# Altium PCB PCB2.PcbDoc
Units mm, origin at the board's own origin, x right, y up, seen from the top; angles counter-clockwise.
Board outline 22.25 x 40.25 mm, 2 copper layers (Top Layer, Bottom Layer); 2 components, 30 nets, 60 pads, 45 vias.
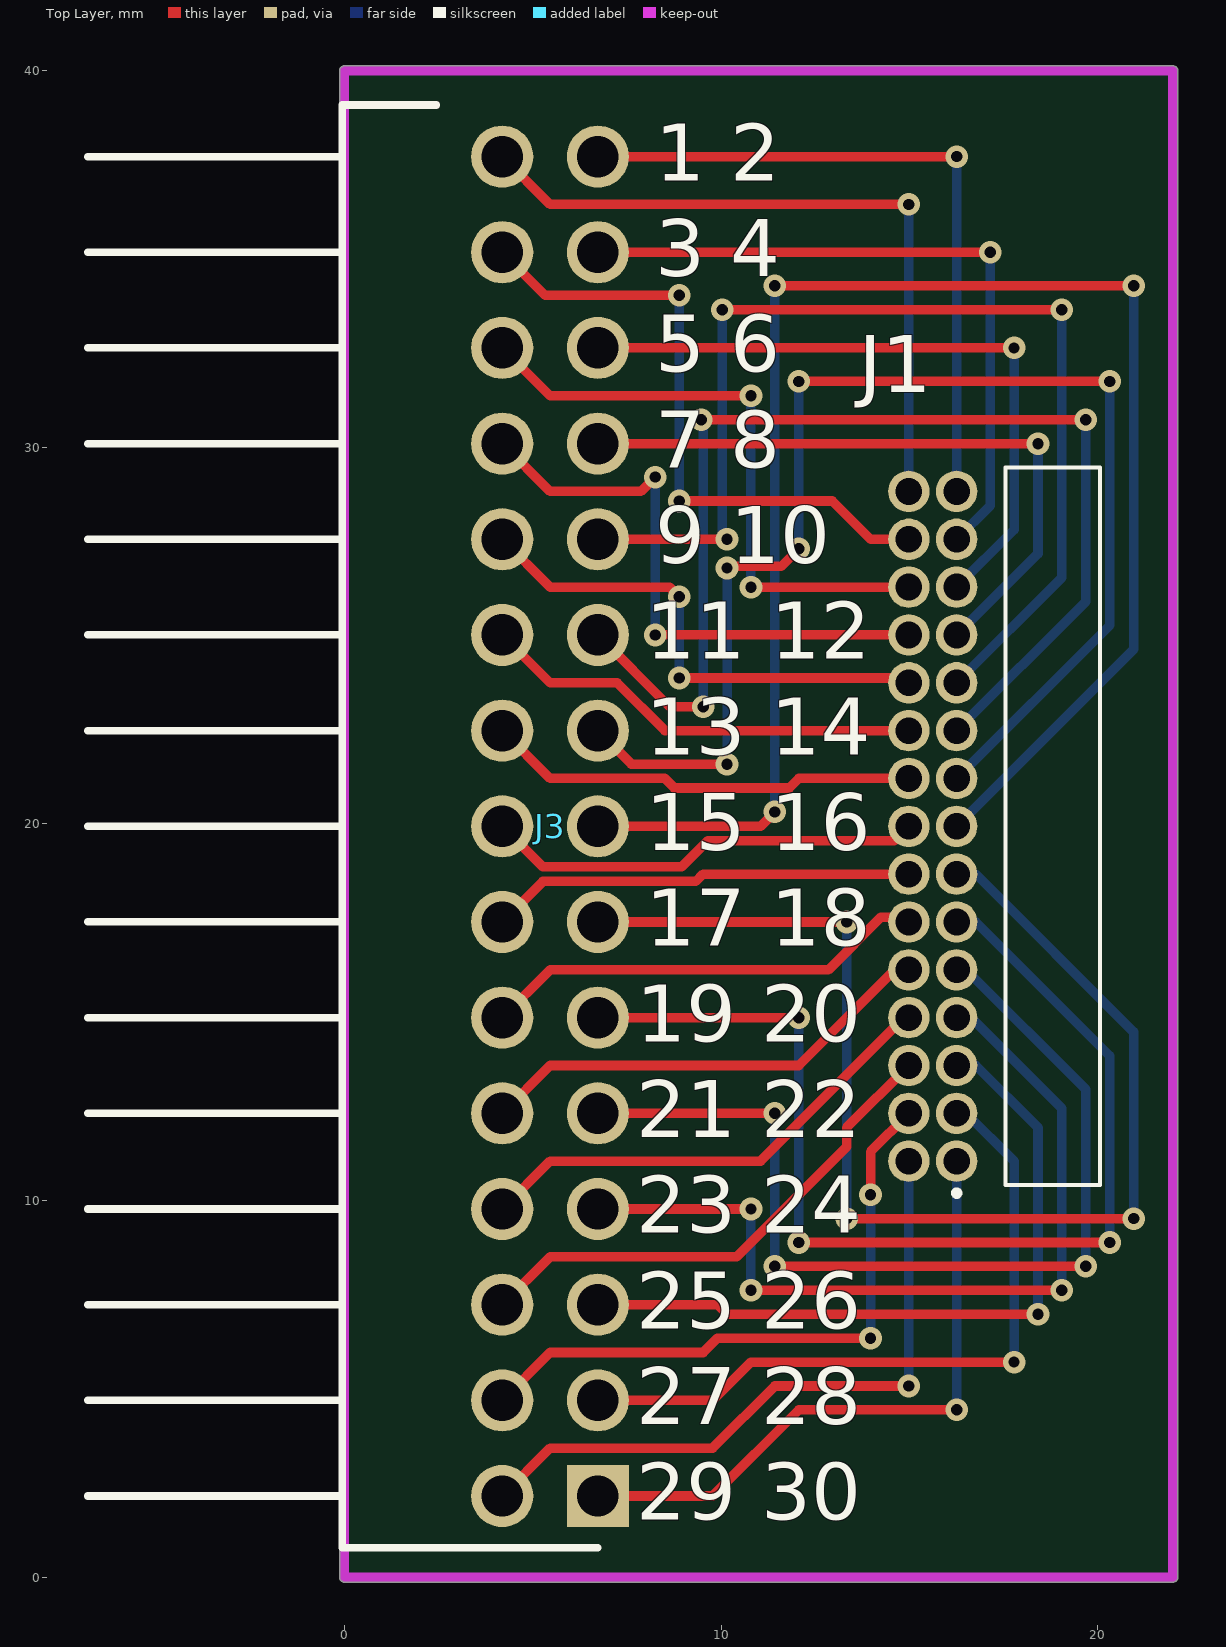
[diagram p0: Top Layer view]
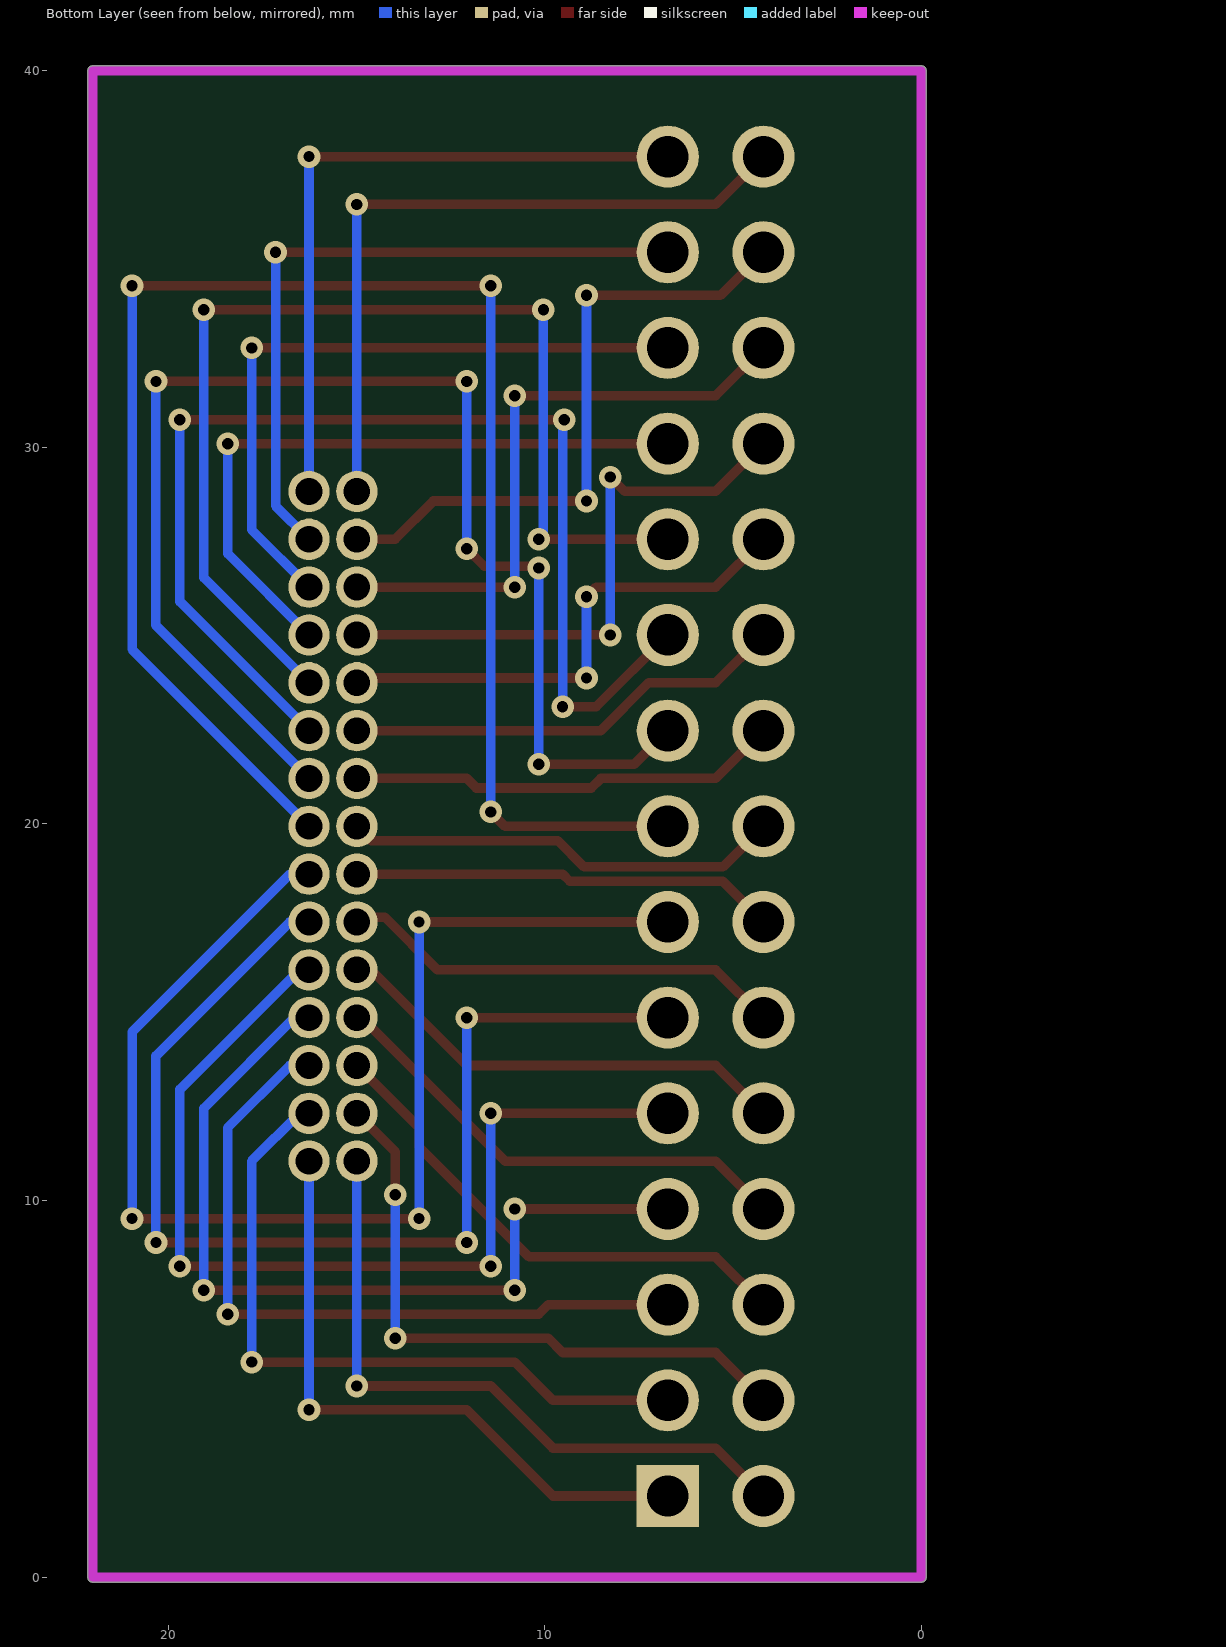
[diagram p1: Bottom Layer view, seen from below]

## Layer stack, top to bottom
Top Solder: solder mask 0.0102, Solder Resist, Dk 3.5
Top Layer: signal copper 0.0356
Dielectric 1: dielectric 0.32, FR-4, Dk 4.8
Bottom Layer: signal copper 0.0356
Bottom Solder: solder mask 0.0102, Solder Resist, Dk 3.5

## Board outline
0,-0.127 cw(c0,0) -0.127,0 -0.127,40 cw(c0,40) 0,40.127 22,40.127 cw(c22,40) 22.127,40 22.127,0 cw(c22,0) 22,-0.127

## Design rules (kind name [scope] priority, off if disabled: settings)
BoardOutlineClearance [All] p1: gap=0.2
Clearance [All] p1: gap=0.127 except(0.114: THPad-THPad)
ComponentClearance [All] p1: gap=0.127 collisioncheckmode=3 verticalgap=0.127 showdistances=TRUE
DiffPairsRouting [All] p1: maxlimit=0.254 minlimit=0.127 mostfreqgap=0.127 toplayer_minwidth=0.127 toplayer_maxwidth=25.4 toplayer_prefwidth=0.127 bottomlayer_minwidth=0.127 bottomlayer_maxwidth=25.4 bottomlayer_prefwidth=0.127 maxuncoupledlength=12.7
Height [All] p1: minheight=0 maxheight=1816.048 prefheight=12.7
HoleSize [All] p1: absolutevalues=TRUE maxlimit=6.3 minlimit=0.3 maxpercent=80.000 minpercent=20.000
HoleToHoleClearance [All] p1: gap=0.25 allowstackedmicrovias=FALSE
MinimumAnnularRing [All] p1: minimumring=0.076
MinimumSolderMaskSliver [All] p1: minsoldermaskwidth=0
PlaneClearance [All] p1: clearance=0.127
PlaneConnect PlaneConnectPowerPads [InPadClass('PowerPads')] p1: planeconnectstyle=Direct reliefexpansion=0.508 reliefentries=4 reliefconductorwidth=0.254 reliefairgap=0.254
PlaneConnect [All] p2: planeconnectstyle=Relief reliefexpansion=0.508 reliefentries=4 reliefconductorwidth=0.254 reliefairgap=0.254
PolygonConnect PolygonConnectPowerPads [All vs (InPadClass('PowerPads'))] p1: connectstyle=Direct reliefconductorwidth=0.254 reliefentries=4 polygonreliefangle="90 Angle" airgapwidth=0.254
PolygonConnect [All] p2: connectstyle=Relief reliefconductorwidth=0.254 reliefentries=4 polygonreliefangle="45 Angle" airgapwidth=0.254
RoutingVias [All] p1: holewidth=0.3 width=0.6 viastyle="Through Hole" minholewidth=0.3 minwidth=0.6 maxholewidth=0.6 maxwidth=6.6
SilkToSilkClearance [All] p1: silktosilkclearance=0
SilkToSolderMaskClearance [IsPad] p1: minsilkscreentomaskgap=0.127 clearancetoexposedcopper=TRUE
SolderMaskExpansion [All] p1: expansion=0.075
Width [All] p1: maxlimit=25.4 minlimit=0.127 preferedwidth=0.254 minimp=50.000000 maximp=50.000000 favimp=50.000000
20 further rules are at their usual default settings.

## Components (designator, comment, footprint, x,y, rotation, side; value= is the part's Value field where it differs from the comment)
J1 "FTSH-115-01-F-D-RA-K" FTSH-115-XX-YYY-D-RA-K 16.256,11.049 r90 top
J3 "90122-0775" HDRRA30W65P254_2X15_3802X250X635P 6.731,2.159 r90 top locked

## Footprints (in the part's own frame and the unit in brackets; to place one, negate y for a bottom-side part, rotate by r counter-clockwise, add the part's x,y. Pads: shape width x height; smd on the part's side, far side on the other; paste and mask are expansions set on the pad)
FTSH-115-XX-YYY-D-RA-K [mm]
  round 1.1 hole 0.71: 1(0,0) 2(0,1.27) 3(1.27,0) 4(1.27,1.27) 5(2.54,0) 6(2.54,1.27) 7(3.81,0) 8(3.81,1.27) 9(5.08,0) 10(5.08,1.27) 11(6.35,0) 12(6.35,1.27) 13(7.62,0) 14(7.62,1.27) 15(8.89,0) 16(8.89,1.27) 17(10.16,0) 18(10.16,1.27) 19(11.43,0) 20(11.43,1.27) 21(12.7,0) 22(12.7,1.27) 23(13.97,0) 24(13.97,1.27) 25(15.24,0) 26(15.24,1.27) 27(16.51,0) 28(16.51,1.27) 29(17.78,0) 30(17.78,1.27)
  silkscreen extent -0.9,-3.8 18.41,0.05
HDRRA30W65P254_2X15_3802X250X635P [mm]
  rect 1.65x1.65 hole 1.1: 1(0,0)
  round 1.65 hole 1.1: 2(0,2.54) 3(2.54,0) 4(2.54,2.54) 5(5.08,0) 6(5.08,2.54) 7(7.62,0) 8(7.62,2.54) 9(10.16,0) 10(10.16,2.54) 11(12.7,0) 12(12.7,2.54) 13(15.24,0) 14(15.24,2.54) 15(17.78,0) 16(17.78,2.54) 17(20.32,0) 18(20.32,2.54) 19(22.86,0) 20(22.86,2.54) 21(25.4,0) 22(25.4,2.54) 23(27.94,0) 24(27.94,2.54) 25(30.48,0) 26(30.48,2.54) 27(33.02,0) 28(33.02,2.54) 29(35.56,0) 30(35.56,2.54)
  silkscreen extent -1.37,0 36.93,13.54, body extent -1.27,-0.35 36.83,13.51, height 6.07

## Part data
J1 J3: "Connector"

## Via types
v1: diameter 0.6, hole 0.3, Top Layer to Bottom Layer, tented both sides, 45 vias

## Nets (pads, with @x,y where several pads share a name; then routed paths per layer and width w, separated by ;. In a path a pad name is that pad's centre, name@x,y a point inside that pad or via, vN(x,y) a via of type N, cw(c..) or ccw(c..) an arc to the next point about the centre after c; other vN are vias at no path point)
1: J1.30 J3.30 | length 18.9
  Top Layer w0.254: J3.30 5.461,36.449 v1(14.986,36.449)
  Bottom Layer w0.254: J1.30 v1(14.986,36.449)
2: J1.29 J3.29 | length 18.4
  Top Layer w0.254: J3.29 v1(16.256,37.719)
  Bottom Layer w0.254: J1.29 v1(16.256,37.719)
3: J1.28 J3.28 | length 17.2
  Top Layer w0.254: J3.28 5.334,34.036 v1(8.89,34.036) ; v1(8.89,28.575) 12.954,28.575 13.97,27.559 J1.28
  Bottom Layer w0.254: v1(8.89,28.575) v1(8.89,34.036)
4: J1.27 J3.27 | length 18.4
  Top Layer w0.254: J3.27 v1(17.145,35.179)
  Bottom Layer w0.254: J1.27 17.145,28.448 v1(17.145,35.179)
5: J1.26 J3.26 | length 16.4
  Top Layer w0.254: J3.26 5.461,31.369 v1(10.795,31.369) ; v1(10.795,26.289) J1.26
  Bottom Layer w0.254: v1(10.795,26.289) v1(10.795,31.369)
6: J1.25 J3.25 | length 18
  Top Layer w0.254: J3.25 v1(17.78,32.639)
  Bottom Layer w0.254: J1.25 17.78,27.813 v1(17.78,32.639)
7: J1.24 J3.24 | length 15.7
  Top Layer w0.254: J3.24 5.461,28.829 7.874,28.829 v1(8.255,29.21) ; v1(8.255,25.019) J1.24
  Bottom Layer w0.254: v1(8.255,25.019) v1(8.255,29.21)
8: J1.23 J3.23 | length 17.7
  Top Layer w0.254: J3.23 v1(18.415,30.099)
  Bottom Layer w0.254: J1.23 18.415,27.178 v1(18.415,30.099)
9: J1.22 J3.22 | length 13.5
  Top Layer w0.254: J3.22 5.461,26.289 8.636,26.289 v1(8.89,26.035) ; v1(8.89,23.876) J1.22@14.859,23.876
  Bottom Layer w0.254: v1(8.89,23.876) v1(8.89,26.035)
10: J1.21 J3.21 | length 29.7
  Top Layer w0.254: J3.21 v1(10.16,27.559) ; v1(10.033,33.655) v1(19.05,33.655)
  Bottom Layer w0.254: v1(10.033,33.655) 10.033,27.686 v1(10.16,27.559) ; J1.21 19.05,26.543 v1(19.05,33.655)
11: J1.20 J3.20 | length 11.8
  Top Layer w0.254: J3.20 5.461,23.749 7.239,23.749 8.509,22.479 J1.20
12: J1.19 J3.19 | length 31.1
  Top Layer w0.254: J3.19 8.636,23.114 v1(9.525,23.114) ; v1(9.479,30.734) v1(19.685,30.734)
  Bottom Layer w0.254: v1(9.479,30.734) 9.525,30.688 v1(9.525,23.114) ; J1.19 19.685,25.908 v1(19.685,30.734)
13: J1.18 J3.18 | length 11.5
  Top Layer w0.254: J3.18 5.461,21.209 8.509,21.209 8.763,20.955 11.811,20.955 12.065,21.209 J1.18
14: J1.17 J3.17 | length 36
  Top Layer w0.254: J3.17 7.62,21.59 v1(10.16,21.59) ; v1(10.16,26.797) 10.206,26.843 11.603,26.843 v1(12.065,27.305) ; v1(12.065,31.75) v1(20.32,31.75)
  Bottom Layer w0.254: v1(10.16,21.59) v1(10.16,26.797) ; v1(12.065,27.305) v1(12.065,31.75) ; J1.17 20.32,25.273 v1(20.32,31.75)
15: J1.16 J3.16 | length 11.7
  Top Layer w0.254: J3.16 5.27,18.86 8.954,18.86 9.652,19.558 14.605,19.558 J1.16
16: J1.15 J3.15 | length 44.6
  Top Layer w0.254: J3.15 11.049,19.939 v1(11.43,20.32) ; v1(11.43,34.29) v1(20.955,34.29)
  Bottom Layer w0.254: v1(11.43,20.32) v1(11.43,34.29) ; J1.15 20.955,24.638 v1(20.955,34.29)
17: J1.14 J3.14 | length 11.3
  Top Layer w0.254: J3.14 5.27,18.478 7.178,18.478 7.179,18.479 9.335,18.479 9.525,18.669 J1.14
18: J1.13 J3.13 | length 33.5
  Top Layer w0.254: J3.13 v1(13.335,17.399) ; v1(13.335,9.525) v1(20.955,9.525)
  Bottom Layer w0.254: v1(13.335,9.525) v1(13.335,17.399) ; J1.13 16.764,18.669 20.955,14.478 v1(20.955,9.525)
19: J1.12 J3.12 | length 11.8
  Top Layer w0.254: J3.12 5.461,16.129 12.848,16.129 14.245,17.526 J1.12@14.859,17.526
20: J1.11 J3.11 | length 30
  Top Layer w0.254: J3.11 v1(12.065,14.859) ; v1(12.065,8.89) v1(20.32,8.89)
  Bottom Layer w0.254: v1(12.065,8.89) v1(12.065,14.859) ; J1.11 16.764,17.399 20.32,13.843 v1(20.32,8.89)
21: J1.10 J3.10 | length 12.4
  Top Layer w0.254: J3.10 5.461,13.589 12.065,13.589 14.605,16.129 J1.10
22: J1.9 J3.9 | length 26.5
  Top Layer w0.254: J3.9 v1(11.43,12.319) ; v1(11.43,8.255) v1(19.685,8.255)
  Bottom Layer w0.254: v1(11.43,8.255) v1(11.43,12.319) ; J1.9 16.51,16.129 19.685,12.954 v1(19.685,8.255)
23: J1.8 J3.8 | length 12.8
  Top Layer w0.254: J3.8 5.461,11.049 11.049,11.049 J1.8@14.859,14.859
24: J1.7 J3.7 | length 23.1
  Top Layer w0.254: J3.7 v1(10.795,9.779) ; v1(10.795,7.62) v1(19.05,7.62)
  Bottom Layer w0.254: v1(10.795,7.62) v1(10.795,9.779) ; J1.7 16.637,14.859 19.05,12.446 v1(19.05,7.62)
25: J1.6 J3.6 | length 13.7
  Top Layer w0.254: J3.6 5.461,8.509 10.414,8.509 13.335,11.43 13.335,11.938 J1.6
26: J1.5 J3.5 | length 19.6
  Top Layer w0.254: J3.5 9.906,7.239 10.16,6.985 v1(18.415,6.985)
  Bottom Layer w0.254: J1.5 16.764,13.589 18.415,11.938 v1(18.415,6.985)
27: J1.4 J3.4 | length 16.9
  Top Layer w0.254: J3.4 5.461,5.969 9.525,5.969 9.906,6.35 v1(13.97,6.35) ; v1(13.97,10.16) 13.97,11.303 J1.4
  Bottom Layer w0.254: v1(13.97,6.35) v1(13.97,10.16)
28: J1.3 J3.3 | length 18.9
  Top Layer w0.254: J3.3 9.779,4.699 10.795,5.715 v1(17.78,5.715)
  Bottom Layer w0.254: J1.3 16.51,12.319 17.78,11.049 v1(17.78,5.715)
29: J1.2 J3.2 | length 18
  Top Layer w0.254: J3.2 5.461,3.429 9.779,3.429 11.43,5.08 v1(14.986,5.08)
  Bottom Layer w0.254: v1(14.986,5.08) J1.2
30: J1.1 J3.1 | length 17.1
  Top Layer w0.254: J3.1 9.779,2.159 12.065,4.445 v1(16.256,4.445)
  Bottom Layer w0.254: v1(16.256,4.445) J1.1

## Keep-outs
Keep-Out Layer:
  lines w0.254: 0,0 0,40 22,40 22,0 0,0

## Silkscreen, mask and mechanical layers (free items; w line width, h text height)
Top Overlay:
  text "1 2" at 8.255,37.084 h1.52
  text "3 4" at 8.255,34.544 h1.52
  text "5 6" at 8.255,32.004 h1.52
  text "7 8" at 8.255,29.464 h1.52
  text "9 10" at 8.255,26.924 h1.52
  text "11 12" at 8.001,24.384 h1.52
  text "13 14" at 8.001,21.844 h1.52
  text "15 16" at 8.001,19.304 h1.52
  text "17 18" at 8.001,16.764 h1.52
  text "19 20" at 7.747,14.224 h1.52
  text "21 22" at 7.747,11.684 h1.52
  text "23 24" at 7.747,9.144 h1.52
  text "25 26" at 7.747,6.604 h1.52
  text "27 28" at 7.747,4.064 h1.52
  text "29 30" at 7.747,1.524 h1.52